# Altium PCB roneMotorBoard-v8-msp.PcbDoc
Units mil, origin at the board's own origin, x right, y up, seen from the top; angles counter-clockwise.
Board outline 3702 x 3936.38 mil, 2 copper layers (Top Layer, Bottom Layer); 60 components, 48 nets, 244 pads, 162 vias.
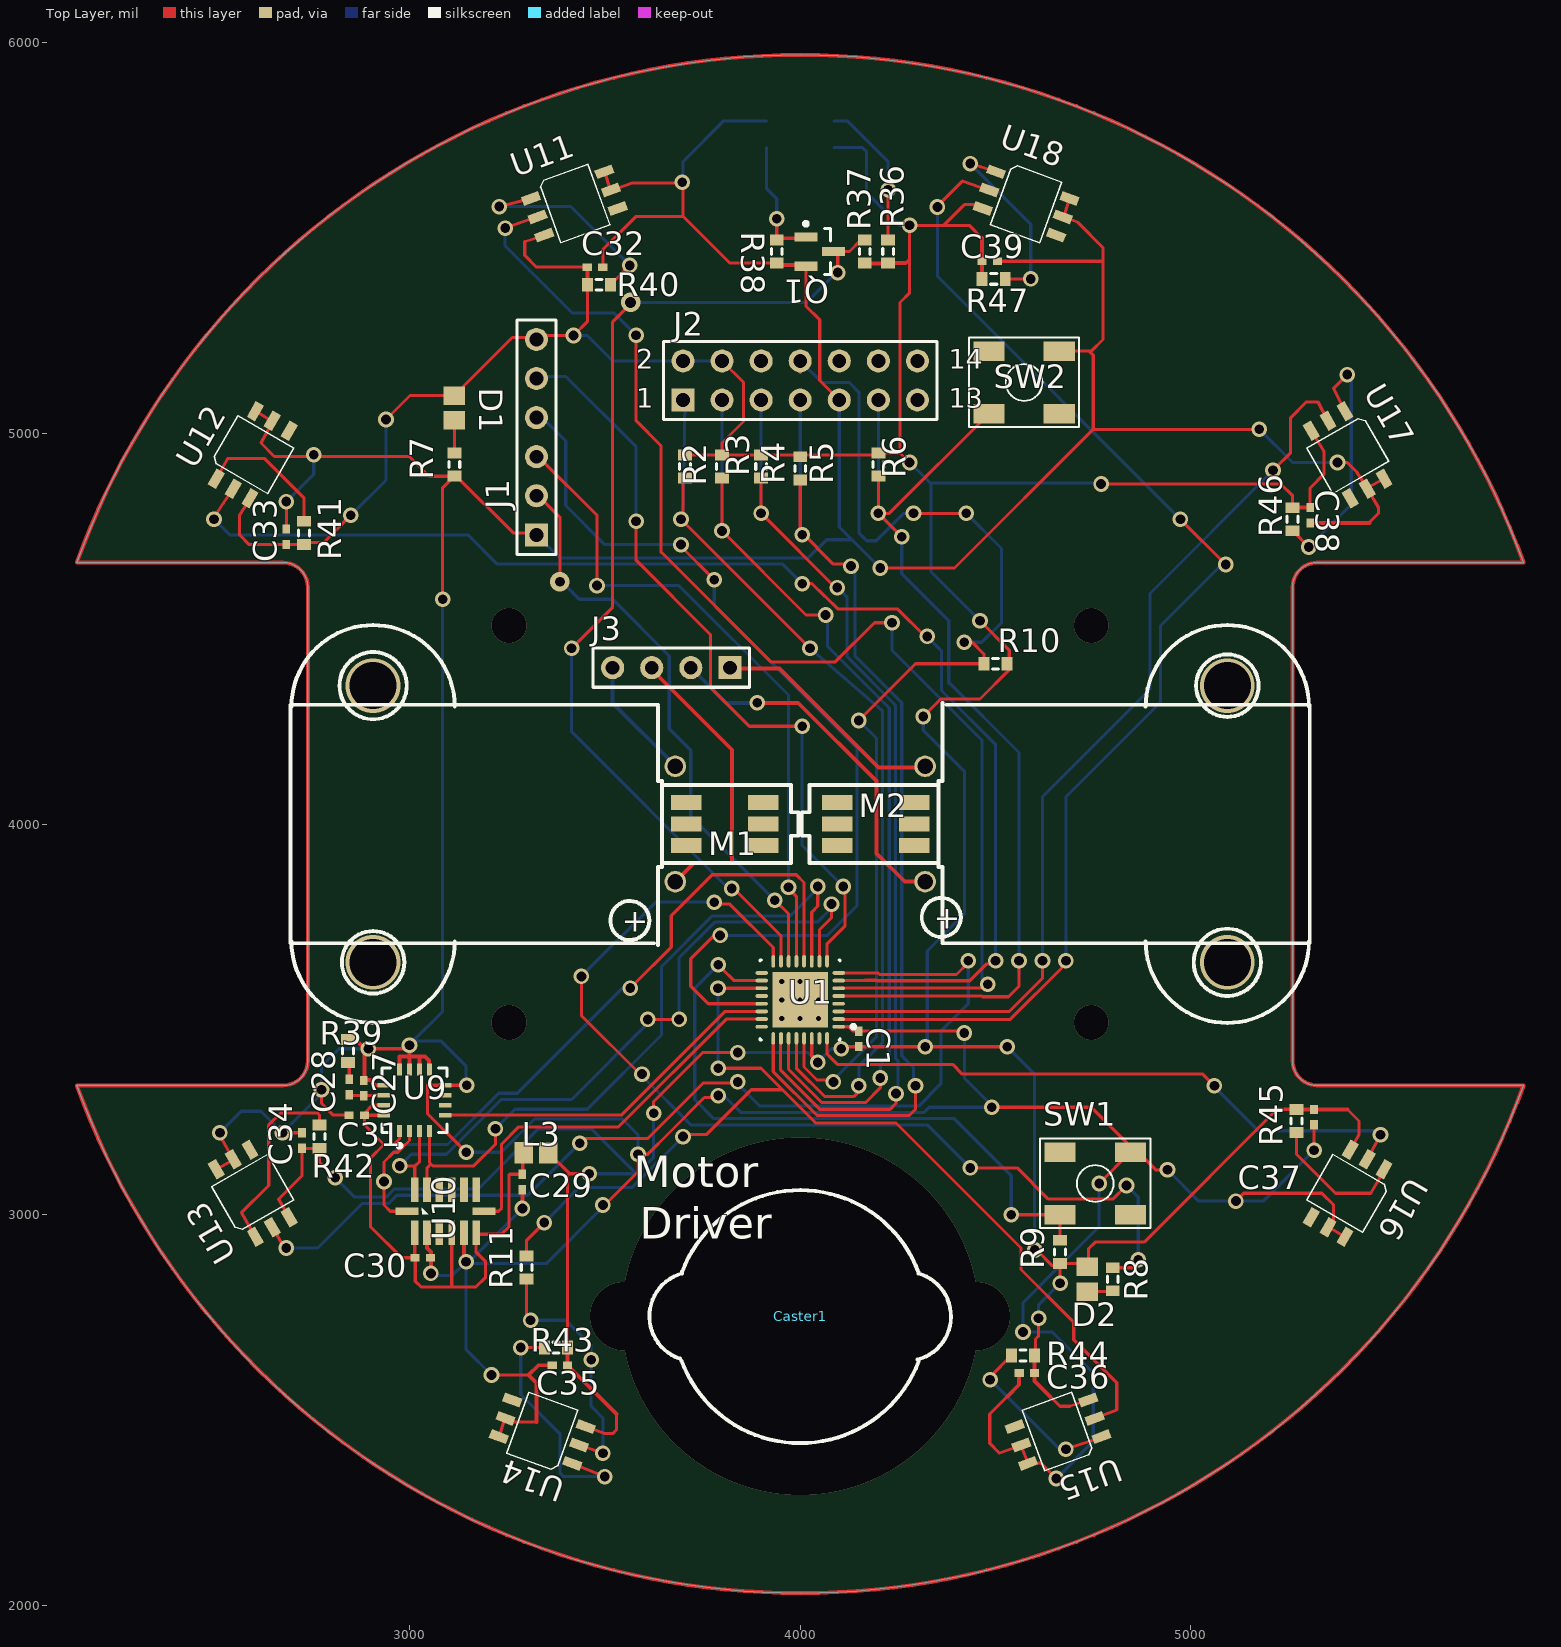
[diagram p0: Top Layer view]
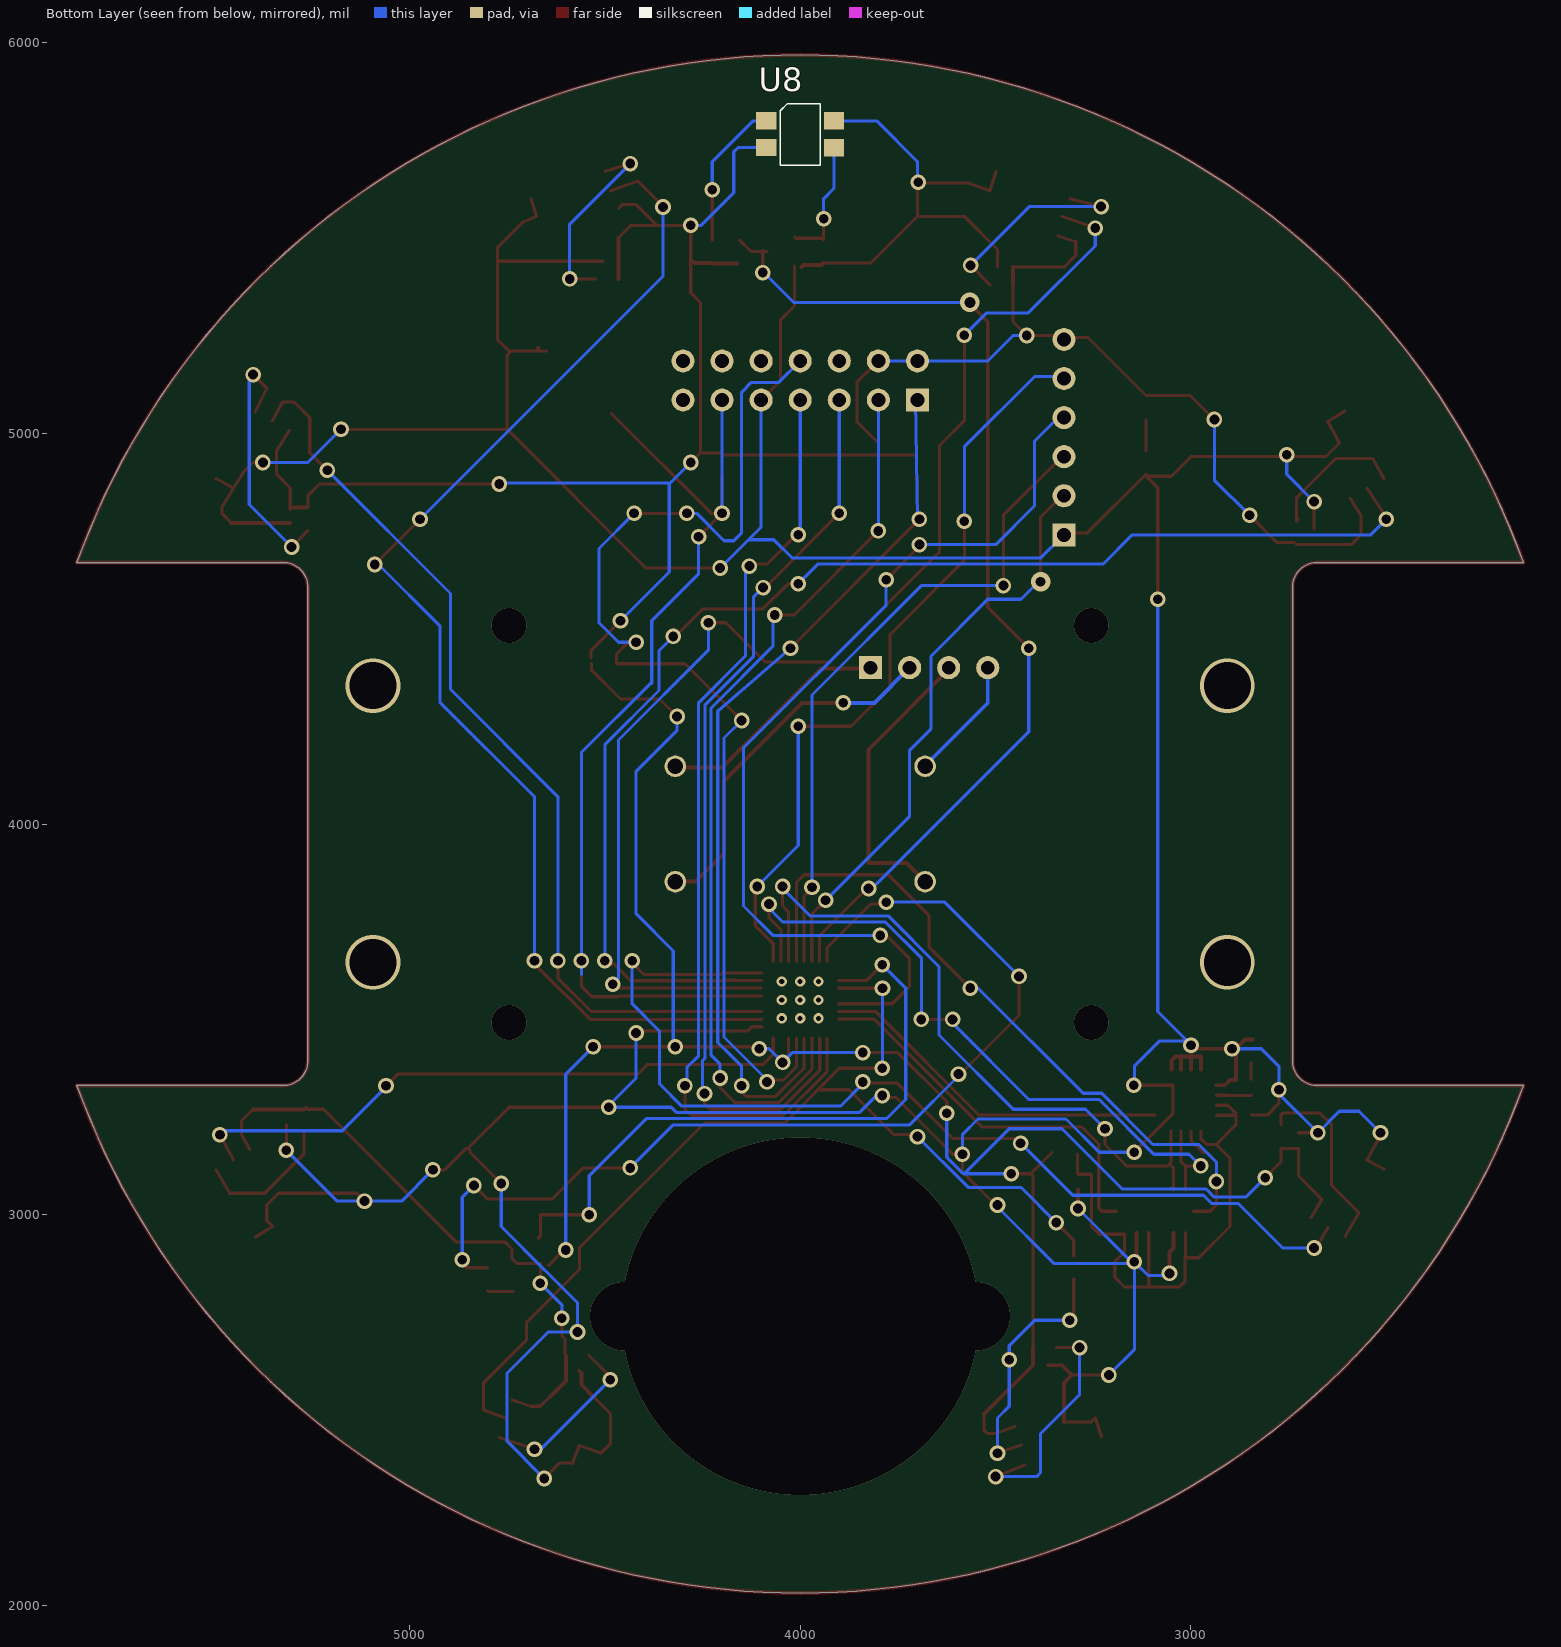
[diagram p1: Bottom Layer view, seen from below]

## Layer stack, top to bottom
Top Layer: signal copper 1.4
Dielectric: dielectric 12.6, FR-4, Dk 4.8
Bottom Layer: signal copper 1.4

## Board outline
2149,3331 2677,3331 ccw(c2677,3394) 2740,3394 2740,4606 ccw(c2677,4606) 2677,4669 2149,4669 cw(c4000,4000) 5851,4669 5323,4669 ccw(c5323,4606) 5260,4606 5260,3394 ccw(c5323,3394) 5323,3331 5851,3331 cw(c4000,4000)

## Design rules (kind name [scope] priority, off if disabled: settings)
Clearance [All] p1: gap=8
PolygonConnect [All] p1: connectstyle=Relief reliefconductorwidth=10 reliefentries=4 polygonreliefangle="90 Angle"
RoutingVias [All] p1: holewidth=25 width=40 viastyle="Through Hole" minholewidth=25 minwidth=40 maxholewidth=25 maxwidth=40
SMDNeckDown [All] p1: percent=50.000
SilkscreenOverComponentPads [All] p1: minsilkscreentomaskgap=10
SolderMaskExpansion [All] p1: expansion=4
Width "Schematic Width Constraint_12" [InNet('NetJ3_3')] p1: maxlimit=25 minlimit=10 preferedwidth=20 minimp=50.000000 maximp=50.000000 favimp=50.000000
Width "Schematic Width Constraint_11" [InNet('NetJ3_4')] p2: maxlimit=25 minlimit=10 preferedwidth=20 minimp=50.000000 maximp=50.000000 favimp=50.000000
Width "Schematic Width Constraint_10" [InNet('NetJ3_1')] p3: maxlimit=25 minlimit=10 preferedwidth=20 minimp=50.000000 maximp=50.000000 favimp=50.000000
Width "Schematic Width Constraint_9" [InNet('NetJ3_2')] p4: maxlimit=25 minlimit=10 preferedwidth=20 minimp=50.000000 maximp=50.000000 favimp=50.000000
Width MotorWidth [InNetClass('MotorNets')] p5: maxlimit=25 minlimit=8 preferedwidth=25
Width [All] p6: maxlimit=8 minlimit=8 preferedwidth=8
27 further rules are at their usual default settings.

## Classes and differential pairs
component class LineCliffSensors: Q1 R36 R37 R38 U8
component class GyroAccelHeaders: C27 C28 C29 C30 C31 L3 R39 U9 U10
component class BumpSensors: C32 C33 C34 C35 C36 C37 C38 C39 R11 R40 R41 R42 R43 R44 R45 R46 R47 U11 U12 U13 U14 U15 U16 U17 U18
component class motorEncoder: Caster1 J3 M1 M2
component class MSP430: C1 D1 D2 J1 J2 R2 R3 R4 R5 R6 R7 R8 R9 R10 R? SW1 SW2 U1

## Components (designator, comment, footprint, x,y, rotation, side; value= is the part's Value field where it differs from the comment)
C1 "Cap Semi" CAPC1005L 4150,3450 r270 top
C27 "Cap Semi" CAPC1005L 2883,3324 r90 top
C28 "Cap Semi" CAPC1005L 2846,3327 r90 top
C29 "Cap Semi" CAPC1005L 3289,3084 r90 top
C30 "Cap Semi" CAPC1005L 3034,2890 r180 top
C31 "Cap Semi" CAPC1005L 2865,3255 r0 top
C32 "Cap Semi" CAPC1005L 3475,5425 r180 top locked
C33 "Cap Semi" CAPC1005L 2685,4735 r270 top locked
C34 "Cap Semi" CAPC1005L 2725,3190 r270 top
C35 "Cap Semi" CAPC1005L 3385,2615 r0 top locked
C36 "Cap Semi" CAPC1005L 4580,2595 r0 top locked
C37 "Cap Semi" CAPC1005L 5315,3250 r90 top locked
C38 "Cap Semi" CAPC1005L 5305,4790 r90 top locked
C39 "Cap Semi" CAPC1005L 4485,5440 r180 top locked
Caster1 "non connect" "3/4\"CASTER2" 4000,2740 r180 top locked
D1 "power" INDC2012L 3115,5065 r270 top
D2 "blinky" INDC2012L 4735,2835 r270 top
J1 "SPI" HDR1X6 3325,4740 r90 top
J2 "JTAG" HDR2X7 3700,5085 r0 top
J3 "motor header" HDR1X4 3820,4400 r180 top
L3 "Inductor" INDC2012L 3324,3159 r0 top
M1 "motorEncoder_V7b" motorEncoder_V7b 3956,4000 r180 top
M2 "motorEncoder_V7b" motorEncoder_V7b 4044,4000 r0 top
Q1 "NPN" SOT-23 4050,5465 r0 top
R2 "Res3" RESC1608L 3705,4915 r90 top
R3 "Res3" RESC1608L 3800,4915 r90 top
R4 "Res3" RESC1608L 3900,4915 r90 top
R5 "Res3" RESC1608L 4000,4910 r90 top
R6 "Res Semi" RESC1608L 4200,4920 r90 top
R7 "330" RESC1608L 3115,4920 r90 top
R8 "330" RESC1608L 4800,2835 r90 top
R9 "Res Semi" RESC1608L 4665,2905 r270 top
R10 "Res Semi" RESC1608L 4500,4410 r0 top
R11 "Res3" RESC1608L 3300,2865 r270 top
R36 "Res3" RESC1608L 4225,5465 r90 top
R37 "Res3" RESC1608L 4165,5465 r270 top
R38 "Res3" RESC1608L 3940,5465 r270 top
R39 "Res3" RESC1608L 2843,3419 r270 top
R40 "Res3" RESC1608L 3485,5380 r180 top locked
R41 "Res3" RESC1608L 2730,4745 r270 top
R42 "Res3" RESC1608L 2770,3200 r270 top
R43 "Res3" RESC1608L 3375,2660 r0 top locked
R44 "Res3" RESC1608L 4570,2640 r0 top locked
R45 "Res3" RESC1608L 5270,3240 r90 top locked
R46 "Res3" RESC1608L 5260,4780 r90 top locked
R47 "Res3" RESC1608L 4495,5395 r180 top locked
SW1 "push button" SwitchTall-TL330 4755,3080 r0 top
SW2 "reset button" SwitchTall-TL330 4573,5130 r0 top
U1 "MSP430" MSP430_32PIN 4000,3550 r180 top locked
U8 "GP2S27TJ000F" GP2S27J0000F 4000,5765 r180 bottom locked
U9 "L3G4200D" L3G2004D 3013,3293 r90 top
U10 "MMA7455L" MMA7455L 2994,2950 r90 top locked
U11 "SFH9240-Z" SFH9240-Z 3422,5588 r20 top locked
U12 "SFH9240-Z" SFH9240-Z 2599,4945 r60 top locked
U13 "SFH9240-Z" SFH9240-Z 2599,3055 r120 top locked
U14 "SFH9240-Z" SFH9240-Z 3340,2445 r160 top locked
U15 "SFH9240-Z" SFH9240-Z 4660,2445 r200 top locked
U16 "SFH9240-Z" SFH9240-Z 5401,3055 r240 top locked
U17 "SFH9240-Z" SFH9240-Z 5401,4945 r300 top locked
U18 "SFH9240-Z" SFH9240-Z 4578,5588 r340 top locked

## Footprints (in the part's own frame and the unit in brackets; to place one, negate y for a bottom-side part, rotate by r counter-clockwise, add the part's x,y. Pads: shape width x height; smd on the part's side, far side on the other; paste and mask are expansions set on the pad)
"3/4\"CASTER2" [mil] "3/4\" caster for board"
  silkscreen extent -386,-323 386,324
CAPC1005L [mm] "Chip Capacitor, Body 1.0x0.5mm, IPC High Density"
  rect 0.6x0.5 smd: 1(-0.5,0) 2(0.5,0)
  body extent -0.55,-0.3 0.55,0.3, height 1.3
GP2S27J0000F [mil] "Phototransistor Output, Compact Reflective Photointerrupter"
  rect 52x44 smd: 1(-86.61,34.45) 2(-86.61,-33.74) 3(86.61,-34.45) 4(86.61,34.45)
  silkscreen extent -51,-79 51,79, body extent -59,-78 59,79, height 67
HDR1X4 [mm] "Connector; Header; 4 Position"
  rect 1.5x1.5 hole 0.9: 1(0,0)
  round 1.5 hole 0.9: 2(2.54,0) 3(5.08,0) 4(7.62,0)
  silkscreen extent -1.27,-1.27 8.89,1.27
HDR1X6 [mm] "Connector; Header; 6 Position"
  rect 1.5x1.5 hole 0.9: 1(0,0)
  round 1.5 hole 0.9: 2(2.54,0) 3(5.08,0) 4(7.62,0) 5(10.16,0) 6(12.7,0)
  silkscreen extent -1.27,-1.27 13.97,1.27
HDR2X7 [mm] "Connector; Header; 7x2 Position"
  rect 1.5x1.5 hole 0.9: 1(0,0)
  round 1.5 hole 0.9: 2(0,2.54) 3(2.54,0) 4(2.54,2.54) 5(5.08,0) 6(5.08,2.54) 7(7.62,0) 8(7.62,2.54) 9(10.16,0) 10(10.16,2.54) 11(12.7,0) 12(12.7,2.54) 13(15.24,0) 14(15.24,2.54)
  silkscreen extent -1.27,-1.27 16.51,3.81
INDC2012L [mm] "Chip Inductor, Body 2.0x1.2mm, IPC High Density"
  rect 1.2x1.4 smd: 1(-0.8,0) 2(0.8,0)
  body extent -1.1,-0.7 1.1,0.7, height 0.55
L3G2004D [mm] "gyroscope"
  rect 0.8x0.3 smd: 1(-2,0.975) 2(-2,0.325) 3(-2,-0.325) 4(-2,-0.975) 9(2,-0.975) 10(2,-0.325) 11(2,0.325) 12(2,0.975)
  rect 0.3x0.8 smd: 5(-0.975,-2) 6(-0.325,-2) 7(0.325,-2) 8(0.975,-2) 13(0.975,2) 14(0.325,2) 15(-0.325,2) 16(-0.975,2)
  silkscreen extent -3.07,-2.1 2.1,2.1, body extent -2.08,-2.08 2.07,2.07, height 1.1
MMA7455L [mm]
  rect 1.6x0.5 smd: 1(0.1,-0.5) 2(0.1,-1.3) 3(0.1,-2.1) 5(0.1,-3.7) 6(0.1,-4.5) 8(2.9,-4.5) 9(2.9,-3.7) 10(2.9,-2.9) 11(2.9,-2.1) 12(2.9,-1.3) 13(2.9,-0.5)
  rect 1.6x0.4 smd: 4(0.1,-2.9)
  rect 0.5x1.5 smd: 7(1.5,-5) 14(1.5,0)
  silkscreen extent 1.31,-1.37 1.74,-0.97
motorEncoder_V7b [mm] "Precision Wire Wound Inductor, 2-Leads, Body 2.5x2.3mm, IPC Medium Density"
  rect 2x1 smd: A(1.291,1.4) C(6.291,1.4) E1(6.291,0) E2(6.291,-1.4) K(1.291,-1.4) NC(1.291,0)
  round 1.4 hole 1: M1(7,3.75) M2(7,-3.75)
  Mechanical 1 keep-out region: 8.382,-7.874 32.004,-7.874 32.004,7.62 8.382,7.62
  silkscreen extent -1.02,-12.93 32,12.93
MSP430_32PIN [mm] "32 pin QFN"
  oval 0.8x0.25 smd: 1(-2.5,1.75) 2(-2.5,1.25) 3(-2.5,0.75) 4(-2.5,0.25) 5(-2.5,-0.25) 6(-2.5,-0.75) 7(-2.5,-1.25) 8(-2.5,-1.75) 17(2.5,-1.75) 18(2.5,-1.25) 19(2.5,-0.75) 20(2.5,-0.25) 21(2.5,0.25) 22(2.5,0.75) 23(2.5,1.25) 24(2.5,1.75)
  oval 0.25x0.8 smd: 9(-1.75,-2.5) 10(-1.25,-2.5) 11(-0.75,-2.5) 12(-0.25,-2.5) 13(0.25,-2.5) 14(0.75,-2.5) 15(1.25,-2.5) 16(1.75,-2.5) 25(1.75,2.5) 26(1.25,2.5) 27(0.75,2.5) 28(0.25,2.5) 29(-0.25,2.5) 30(-0.75,2.5) 31(-1.25,2.5) 32(-1.75,2.5)
  rect 3.6x3.6 smd: 33(0,0)
  silkscreen extent -3.58,-2.6 2.6,2.6, body extent -2.58,-2.57 2.57,2.58, height 1
RESC1608L [mm] "Chip Resistor, Body 1.6x0.8mm, IPC High Density"
  rect 0.7x0.9 smd: 1(-0.75,0) 2(0.75,0)
  silkscreen extent -0.2,-0.35 0.2,0.35, body extent -0.85,-0.48 0.85,0.48, height 0.9
SFH9240-Z [mil] "Reflective Interrupter with Schmitt-Trigger"
  rect 47x24 smd: 1(-100,50) 2(-100,0) 3(-100,-50) 4(100,-50) 5(100,0) 6(100,50)
  silkscreen extent -67,-83 67,83, body extent -59,-78 59,79, height 67
SOT-23 [mm] "SOT23, 3-Leads, Body 3.0x2.5mm (max), Pitch 0.95mm, IPC Medium Density"
  rect 1.5x0.6 smd: 1(-0.9,0.95) 2(-0.9,-0.95) 3(0.9,0)
  silkscreen extent -1.02,-1.5 0.7,1.92, body extent -0.7,-1.5 0.7,1.5, height 1.2
SwitchTall-TL330 [mil] "Small SMDTall Tact Switch E-Switch TL330"
  rect 80x50 smd: 1(-90,80) 2(90,80) 3(-90,-80) 4(90,-80)
  silkscreen extent -141,-114 141,115

## Part data
C1 C27 C28 C29 C30 C31 C32 C33 C34 C35 C36 C37 C38 C39: "Capacitor (Semiconductor SIM Model)"
Caster1: library part "Caster 3/4in", "This is just a space saver to get the caster onto the pcb"
D1 D2: library part LED
J1: library part "Header 6", "Header, 6-Pin"
J2: library part "Header 7X2", "Header, 7-Pin, Dual row"
J3: library part "Header 4", "Header, 4-Pin"
R2 R3 R4 R5 R11 R36 R37 R38 R39 R40 R41 R42 R43 R44 R45 R46 R47: "Resistor"
R6 R9 R10: "Semiconductor Resistor"
R7 R8: library part Res3, "Resistor"
SW1 SW2: library part Switch-TL330
U1: library part MSP430_32pin
U9: "3axis gyroscope, SPI"
U10: "3axis accelerometer"

## Via types
v1: diameter 40, hole 25, Top Layer to Bottom Layer, 136 vias
v2: diameter 25.98, hole 12.99, Top Layer to Bottom Layer, tented top, 9 vias
v3: diameter 89, hole 89, Top Layer to Bottom Layer, 8 vias
v4: diameter 140, hole 120, Top Layer to Bottom Layer, 4 vias
v5: diameter 175, hole 175, Top Layer to Bottom Layer, 2 vias
v6: diameter 50, hole 25, Top Layer to Bottom Layer, 1 vias
v7: diameter 915, hole 915, Top Layer to Bottom Layer, 1 vias
v8: diameter 50, hole 28, Top Layer to Bottom Layer, 1 vias

## Nets (pads, with @x,y where several pads share a name; then routed paths per layer and width w, separated by ;. In a path a pad name is that pad's centre, name@x,y a point inside that pad or via, vN(x,y) a via of type N, cw(c..) or ccw(c..) an arc to the next point about the centre after c; other vN are vias at no path point)
3.3V: C1.2 C32.2 C33.2 C34.2 C35.2 C36.2 C37.2 C38.2 C39.2 D1.1 D2.1 J1.6 J2.2 J2.4 L3.2 R2.2 R3.2 R4.2 R5.2 R6.2 R9.2 R10.2 R36.1 R37.2 R40.2 R41.2 R42.2 R43.2 R44.2 R45.2 R46.2 R47.2 U1.30 U8.2 U11.3 U12.3 U13.3 U14.3 U15.3 U16.3 U17.3 U18.3 | length 13213.4
  Top Layer w8: U12.3 2565,4790 2565,4740 2590,4715 R41.2@2730,4715 ; U13.3 2665,3040 2725,3100 C34.2 R42.2@2770,3170 ; R41.2@2735,4720 2780,4720 v1(2850,4790) ; R42.2 2770,3135 v1(2810,3095) ; v1(2940,5035) 3001.5,5096.5 D1.1 3263.5,5245 J1.6@3325,5245 ; J1.6 3335,5250 v1(3420,5250) 3455.47,5285.47 R40.2 ; U11.3@3340,5505 3295,5490 3295,5455 3325,5425 C32.2 ; L3.2@3355.75,3159.25 3410,3105 ; R43.2 3404.53,3099.53 3410,3105 ; U14.3 3500,2440 3520,2440 3530,2450 3530,2489.69 ; v1(3460,3105) 3410,3105 ; v1(3625,3260) 3630,3260 3625,3265 3625,3290 3750,3415 v1(3840,3415) v1@3840,3410 ; R2.2 R3.2@3794.53,4944.53 ; J2.4 3855,5130 3855,5030 3800,4975 R3.2 R4.2 4199.53,4944.53 R6.2@4204.53,4949.53 ; 4029.53,3405.47 U1.30 ; v1@4110,3430 C1.2@4145,3430 ; C1.2@4150,3430 C1.2@4145,3430 ; R6.2 R6.2@4204.53,4949.53 ; R6.2@4205,4950 R6.2@4204.53,4949.53 ; 4270,5435 4280,5445 ; v1(4280,4925) 4255.47,4949.53 ; v1(4315,4275) 4360,4320 4460,4320 4534.53,4394.53 R10.2@4534.53,4410 ; v1(4460,4520) 4535,4445 R10.2@4535,4425 ; U18.3@4465,5575 4455,5585 4420,5585 4367,5532 ; 4465.29,5499.71 4433,5532 4367,5532 ; v1(4530,3430) v1(4320,3430) C1.2@4145,3430 ; R44.2 4602,2642.47 4602,2682 4610,2690 v1(4610,2735) ; v1(4600,2910) 4605,2910 4645,2870 ; 4640,2535 4665,2510 4690,2510 U15.3 ; v1(4665,2825) R9.2@4665,2865 ; R9.2 4725.47,2875.47 4737.5,2887.5 4737.5,2912.5 4755,2930 4880,2930 5220,3270 5260,3270 R45.2@5265,3275 ; v1(4770,4870) 5200,4870 ; 5205,4870 5200,4870 ; R46.2 5260,4840 5230,4870 5200,4870 ; C38.2@5305,4805 5305,4860 5340,4895 5340,4955 U17.3 ; 5400.47,3269.53 5430,3240 5430,3205 U16.3 ; R6.2@4204.53,4949.53 4255.47,4949.53 ; 4255.47,4949.53 4255.47,5334.53 4280,5359.06 4280,5445 ; 4280,5445 v1(4280,5532) 4367,5532
  Top Layer w10: R43.2@3404.69,2659.69 C35.2 3530,2489.69 ; R40.2 C32.2@3455.47,5425 ; R37.2@4162,5434 4223.53,5434 R36.1 4268.47,5435.47 ; 4465.29,5499.71 C39.2 R47.2 ; R44.2 4599.53,2574.47 4639,2535 ; R46.2@5265.47,4809.53 C38.2@5305,4809.53 ; R45.2 5400.47,3269.53
  Bottom Layer w8: v1(2810,3095) 2860,3045 2940.25,3045 2961.25,3066 3176,3066 3330,3220 3465,3220 3580,3105 ; v1(2850,4790) 2940,4880 v1(2940,5035) ; v1(3420,5250) 3455,5250 3520,5185 J2.2 J2.4 ; v1(3460,3105) 3582.37,3105 3625,3147.63 3625,3255 3630,3260 v1(3625,3260) ; v1(3840,3415) 4020,3415 v1(4045,3390) 4080,3425 v1(4105,3425) ; U8.2 4158.74,5731.26 4170,5720 4170,5615 4253,5532 v1@4278,5532 ; v1(4280,4925) 4332.5,4872.5 ; v1(4315,4275) 4315,4240 4420,4135 4420,3770 4325,3675 4325,3435 v1(4320,3430) ; v1(4460,4520) 4335,4645 4335,4870 4332.5,4872.5 ; v1(4530,3430) 4600,3360 v1(4600,2910) ; v1(4610,2735) 4610,2770 v1(4665,2825) ; v1(4770,4870) 4767.5,4872.5 4332.5,4872.5
BUMP0: U1.6 U11.2 | length 3302.8
  Top Layer w8: v1(3245,5525) 3327.87,5554.25 U11.2@3330,5555 ; v1(3580,5251) 3580,5032 3643.43,4968.57 3643.43,4695.57 ; 3645,4695 3925,4415 4008.75,4415 ; 4010,4415 4040,4415 ; 4041.25,4415 4090,4415 4190,4515 v1(4235,4515) ; U1.6@4100,3580 4470,3580 v1(4480,3590)
  Bottom Layer w8: v1(3245,5525) 3245,5479 3416,5308 3523,5308 v1(3580,5251) ; v1(4235,4515) 4235,4445 4465,4215 4465,3605 v1(4480,3590)
BUMP1: U1.7 U12.2 | length 3355.9
  Top Layer w8: v1@2497.66,4781.57 2523.85,4820.77 U12.2 ; v1(4005,4615) 4030.25,4615 4097,4550 4218.75,4550 ; U1.7 4165.79,3599.21 4166.57,3600 4195.17,3600 4196.17,3599 4434,3599 4477,3642 4492,3642 v1(4500,3650) ; 4220,4550 4250,4550 4320,4480 v1(4325,4480)
  Bottom Layer w8: v1(2500,4780) 2540,4740 2633,4740 3150,4740 3225,4665 3955,4665 v1(4005,4615) ; v1(4325,4480) 4361.31,4443.69 4361.31,4341.31 ; 4361.5,4341.5 4500,4203 v1@4500,3660
BUMP2: U1.8 U13.2 | length 2656.3
  Top Layer w8: U13.2 2680,2915 v1(2685,2915) ; v1@3440,3185 3450,3195 3610,3195 3752.5,3337.5 v1@3842.5,3337.5 ; U1.8 4198.9,3618.9 4202.8,3615 4400,3615 4430,3645 v1(4430,3650)
  Bottom Layer w8: v1(2685,2915) 2765,2915 2879,3029 2946.88,3029 2967.88,3050 3303,3050 v1(3436,3183) ; v1@3840,3335 3897,3278 4303,3278 4360,3335 4360,3470 4430,3540 v1(4430,3650)
  other v1: 3840,3340
BUMP3: R11.2 U14.2 | length 644.4
  Top Layer w8: R11.2@3300,2835 3300,2740 v1(3310,2730) ; U14.2 v1(3495,2390) ; v1@3464,2630 v1(3465,2629)
  Bottom Layer w8: v1(3310,2730) 3400,2730 3465,2665 v1(3465,2629) 3465,2510 3495,2480 v1(3495,2390)
BUMP4: R11.1 U1.19 U15.2 | length 2745.7
  Top Layer w8: R11.1 3300,2935 v1(3345,2980) ; v1(3700,3200) 3710,3200 3715,3205 3760,3205 3875,3320 3955,3320 ; v1(3789.53,3579.53) U1.19 ; v1(3790,3375) 3899.75,3375 4039.75,3235 4245,3235 4565,2915 4565,2860 4700,2725 4700,2680 4810,2570 4810,2500 U15.2@4755,2480
  Bottom Layer w8: v1(3345,2980) 3435,3070 3570,3070 3705,3205 3710,3200 v1(3700,3200) ; v1@3789.53,3365.47 v1(3789.53,3579.53)
BUMP5: U1.32 U16.2 | length 1616.4
  Top Layer w8: U1.32 4068.9,3411.36 4077,3403.25 ; 4077,3403 4095,3385 4390,3385 4415,3360 5030,3360 v1(5060,3330) v1@5055,3325 ; U16.2@5450,3140 5450.89,3141.66 v1(5485,3205)
  Bottom Layer w8: v1@5063.5,3323.5 5172,3215 5475,3215 v1(5485,3205)
BUMP6: U1.3 U17.2 | length 2413
  Top Layer w8: U1.3 4098.9,3520 4535,3520 4620,3605 v1(4620,3650) ; v1@5210,4895 5210,4910 5215,4910 5255,4950 5255,5040 5295,5080 5325,5080 U17.2
  Bottom Layer w8: v1(4620,3650) 4620,4070 4895,4345 4895,4590 v1@5212.5,4907.5
  other v1: 5210,4905
BUMP7: U1.2 U18.2 | length 3220.7
  Top Layer w8: U1.2 4099.21,3500 4537.63,3500 4670,3632.37 v1@4670,3650 ; v1(4351,5579) 4351,5581 4415,5645 4483.44,5620.56 U18.2@4485,5620 ; v1(4973,4780) v1(5089,4664)
  Bottom Layer w8: 4351,5401 v1(4351,5579) ; 4352,5401 v1(4973,4780) ; v1(4680,3650) 4680,4070 4922,4312 4922,4507 5079,4664 v1(5089,4664)
CLIFF1: Q1.3 R37.1 U1.15 | length 2681.1
  Top Layer w8: v1(3415,4450) 3520,4555 3520,5285 3559.5,5324.5 v8@3559.5,5333.5 ; v1(3825,3835) 3830,3835 3950.79,3714.21 U1.15 ; Q1.3 Q1.3@4096,5465 ; v1(4096,5411) Q1.3@4096,5465 ; Q1.3@4096,5467 Q1.3@4096,5465 ; R37.1@4155,5494 4126,5465 Q1.3@4096,5465
  Bottom Layer w8: v1@3415,4459 3415,4236 3805,3846 ; v8(3566,5335) 4017,5335 v1@4099,5417 ; v1@3810,3840 3820,3840 v1(3825,3835)
FROBBY_BUTTON: R9.1 SW1.3 U1.18 | length 1687.9
  Top Layer w8: v1(3790,3640) 3790,3630 3800,3630 3830.79,3599.21 U1.18 ; v1(4540,3000) SW1.3 4665,2945 R9.1@4670,2940
  Bottom Layer w8: v1(3790,3640) 3790,3630 3780,3630 3730,3580 3730,3295 3779,3246 4394,3246 4540,3100 v1(4540,3000)
GND: C1.1 C27.2 C29.1 C30.1 C31.1 C32.1 C33.1 C34.1 C35.1 C36.1 C37.1 C38.1 C39.1 J1.1 J2.9 Q1.2 R7.1 R38.2 R39.1 SW1.2 SW2.2 U1.1 U8.4 U9.8 U9.9 U9.10 U9.11 U9.12 U9.13 U10.2 U10.5 U11.5 U11.6 U12.5 U12.6 U13.5 U13.6 U14.5 U14.6 U15.5 U15.6 U16.5 U16.6 U17.5 U17.6 U18.5 U18.6 | length 17264.5
  Top Layer w8: U13.6 2549.88,3139.94 2550,3140 2549.08,3141.65 v1@2510.85,3210.47 ; U12.6 2648.56,5030.87 2650,5030 2620,4975 2654.4,4940.6 2655.6,4940.6 2656.2,4940 3000,4940 3050,4890 R7.1@3114.53,4890 ; v1(2675.13,3210.13) 2675.25,3210 C34.1@2725,3210 ; C33.1 v1(2685,4825) ; v1(2775,3320) 2775,3285 2805,3255 C31.1 ; v1(2895,3425) 2990,3425 v1@3000,3435 ; v1(3085,4575) 3085,4860.47 R7.1@3114.53,4890 ; U9.8 3046.39,3331.39 3046.39,3258.61 v1(3145.13,3159.87) ; R7.1@3115,4890 R7.1@3114.53,4890 ; R7.1 R7.1@3114.53,4890 ; R7.1@3115,4895.47 3265.47,4745 J1.1@3325,4745 ; v1(3210,2590) 3305,2590 ; U14.6 3244.86,2479.59 3245,2480 3255,2470 3325,2470 ; v1(3495,3025) 3495,3020 3585,3110 v1(3585,3155) 3610,3155 3668,3213 3668,3213.25 3754.75,3300 3790,3300 v1(3790,3305) ; C32.1@3495,5425 3495,5470 3580,5555 3700,5555 ; U11.6 3514.44,5621.7 3515,5620 3516.56,5620.57 3570,5640 3700,5640 3700,5555 ; R38.2 3819.53,5435.47 3700,5555 ; Q1.2 4014.57,5325.43 4050,5290 4050,5135 J2.9 ; U1.1 4123.9,3481.1 4135,3470 v1@4410,3470 ; v1(4205,4655) 4395,4655 4750,5010 ; v1@4410.47,3470 v1@4410,3470 ; v1@4415,3465 v1@4410,3470 ; v1(4490,3275) 4745,3275 4850,3170 SW1.2@4845,3165 ; C39.1 4775,5440 ; 4530,2535 4485,2490 4485,2415 4510,2390 4565,2410 4582.31,2365.91 U15.6@4582.67,2365 ; C36.1 C36.1@4566.25,2600.94 ; U15.6@4580,2365 U15.6@4582.67,2365 ; U15.6 U15.6@4582.67,2365 ; SW2.2@4650,5210 SW2.2 4740,5210 ; v1(4655,2325) 4615,2365 U15.6@4582.67,2365 ; SW2.2@4670,5220 4670,5215 SW2.2@4671.76,5219.28 ; U18.6 4675,5555 4710,5540 4775,5475 4775,5240 4745,5210 4740,5210 ; v1(4765,3080) SW1.2 ; SW1.2@4855,3170 4910,3115 v1(4940,3115) ; v1(5115,3035) 5135,3055 5335,3055 5365,3025 5365,2985 5350,2970 5351.44,2969.13 U16.6 ; v1(5175,5010) 4750,5010 ; v1(5315,3165) C37.1 ; v1(5375,4925) 5400,4925 5425,4900 U17.5 ; 5455,4770 5455.31,4770.31 5480,4795 5480,4810 U17.5 5450,4860 5450.12,4860.06 U17.6 ; 4740,5210 4750,5200 4750,5010
  Top Layer w10: R39.1 2861.47,3448.53 v1@2885,3425 ; v1(2895,3425) v1@2885,3425 ; U9.13 2913.61,3331.39 2900,3345 2885,3345 v1@2885,3425 ; U9.12 2974.61,3405 3000.2,3405 ; U9.11 3000.2,3405 ; v1@3000.2,3425.2 3000.2,3405 ; U9.10 3025.8,3404.2 ; U10.2 3045.18,2914.82 3055,2905 v1(3055,2850) ; U9.9@3050,3371.74 3050,3395 3040,3405 3000.2,3405 ; U9.8 v1(3146.39,3331.39) ; U10.5 3139.67,2885.33 v1(3145,2880) ; v1(3289,3016) C29.1 ; 3325,2470 3325,2570 3305,2590 3330,2615 C35.1 ; R38.2 3945.47,5430 3992,5430 Q1.2@3997,5425 ; 4530,2535 4560,2565 4560,2594.69 C36.1 ; C38.1 5455.31,4770.31 5457,4770.31
  Bottom Layer w8: v1(2515,3210) 2570,3265 2620.25,3265 v1(2675.13,3210.13) 2775,3310 v1(2775,3320) 2775,3380 2820,3425 v1(2895,3425) ; v1(2685,4825) 2755,4895 v1(2755,4945) ; v1@3000,3445 v1@3010,3445 ; v1@3055,2845 3110,2845 3140,2875 v1(3145,2880) v1@3145,2875 ; v1(3085,4575) 3085,3520 v1@3010,3445 ; v1@3145,3345 3145,3380 3080,3445 v1@3010,3445 ; v1(3145.13,3159.87) 3145.25,3160 3235,3160 3320,3245 3545,3245 3585,3205 3585,3160.88 3588.68,3157.21 3590,3155 v1(3585,3155) ; v1@3150,2880 3153,2880 v1(3289,3016) ; v1(3210,2590) 3145,2655 v1@3145,2875 ; J1.1@3335,4735 3330,4735 3384,4681 4021,4681 4067.5,4727.5 4132.5,4727.5 ; v1(3495,3025) 3495,3020 3350,2875 v1@3145,2875 ; v1@3700,5645 3700,5695 3804.45,5799.45 U8.4 ; v1@3805,3305 3848,3262 4317,3262 4330,3275 v1@4495,3275 ; J2.9 4100,4760 4132.5,4727.5 ; v1(4205,4655) 4132.5,4727.5 ; v1@4415,3465 v1@4420,3470 ; v1(4420,3465) 4420,3350 v1@4498,3272 ; v1@4567.53,2685 4570,2687.47 v1(4570,2700) ; v1@4660,2330 4750,2420 4750,2595 4645,2700 v1(4570,2700) ; v1(4765,3080) 4765,2970 4652,2857 4651.75,2857 4570,2775.25 v1(4570,2700) ; v1(4940,3115) 5020,3035 v1(5115,3035) 5185,3035 v1(5315,3165) ; v1(5175,5010) 5260,4925 v1(5375,4925)
  Bottom Layer w10: v1@3135,2875 v1@3140,2875
  other v1: 3000,3434 3698,5642
JTAG_BOTTOM_TCK: J2.7 R5.1 U1.25 | length 2595.2
  Top Layer w8: U1.25 3931.1,3366.27 4043.37,3254 4279,3254 4295,3270 v1(4295,3330) v1@4285,3340 ; R5.1 4000,4750 4085,4665 v1@4125,4665
  Bottom Layer w8: J2.7 4000,4760 v1@4005,4755 ; v1@4125,4665 4140,4650 4140,4430.25 4260,4310.25 4260,3406.75 4290,3376.75 v1@4290,3337.37
  other v1: 4130,4660 4005,4740
JTAG_BOTTOM_TDI: J2.3 R3.1 U1.27 | length 2489.9
  Top Layer w8: v1(3800,4750) 4015,4535 v1@4070,4535 ; v1@3800,4760 R3.1 ; U1.27 3970,3451.1 3970,3372.63 4055.63,3287 4167,3287 4205,3325 v1(4205,3350) v1@4205,3360
  Bottom Layer w8: v1@3800,4740 v1(3800,4750) J2.3 ; v1@4070,4535 4070,4455 4228,4297 4228,3408 4205,3385 v1(4205,3350)
  other v1: 4065,4535
JTAG_BOTTOM_TDO: J2.1 R2.1 U1.28 | length 2395.9
  Top Layer w8: v1(3695,4780) v1(4025,4450) ; v1@3700,4775 3700,4880.47 R2.1 ; U1.28 3990.16,3375.1 4062.25,3303 4138,3303 4150,3315 v1(4150,3330)
  Bottom Layer w8: v1@3700,4780 J2.1@3705,5085 ; v1(4025,4450) 4210,4290 4211,4289 4211,3441 4182,3412 4181.75,3412 4150,3380.25 v1@4150,3335
JTAG_BOTTOM_TEST: J2.8 R10.1 U1.29 | length 2917.7
  Top Layer w8: 4000,5155 J2.8 ; U1.29 4009.84,3378.04 4042.88,3345 v1@4085,3345 ; v1(4150,4265) 4295,4410 R10.1@4465,4410 ; v1(4290,4795) v1(4425,4795) ; v1(4420,4465) 4440,4465 4470,4435 4470,4410.47 R10.1
  Bottom Layer w8: J2.8 4055,5130 4125,5130 4150,5105 4150,4745 4170,4725 4195,4725 4265,4795 v1(4290,4795) ; v1@4085,3345 4195,3455 4195,4220 v1(4150,4265) ; v1(4425,4795) 4515,4705 4515,4515 4465,4465 v1@4430,4465
  other v1: 4085,3340
JTAG_BOTTOM_TMS: J2.5 R4.1 U1.26 | length 2457.1
  Top Layer w8: v1(3900,4795) v1@4095,4600 ; v1@3900,4800 R4.1 ; U1.26 3950,3450.79 3950,3370 4050,3270 4230,3270 4245,3285 v1@4245,3305
  Bottom Layer w8: v1(3900,4795) J2.5 ; v1(4095,4605) 4120,4580 4120,4427.63 4244,4303.63 4244,3400.12 4250,3394.12 4250,3315 v1(4245,3310)
LED_IR_BEACON: U1.24
NetC28_2: C28.2 R39.2 | length 42.3
  Top Layer w8: C28.2 R39.2@2846,3389
NetD1_2: D1.2 R7.2 | length 78.5
  Top Layer w8: R7.2@3115,4955 D1.2
NetD2_2: D2.2 R8.1 | length 65.6
  Top Layer w8: D2.2 4798.5,2803.5 R8.1@4800,2805
NetJ3_1: J3.1 M2.M1 | length 605.6
  Top Layer w10: J3.1 3822,4398 3947,4398 4200,4145 M2.M1@4320,4145
NetJ3_2: J3.2 M2.M2 | length 934.8
  Top Layer w10: v1(3890,4310) 3995,4310 4195,4110 4195,3925 4267.64,3852.36 M2.M2
  Bottom Layer w10: J3.2 3810,4310 v1(3890,4310)
NetJ3_3: J3.3 M1.M1 | length 748
  Top Layer w10: J3.3@3620,4395 3825,4190 3825,3900 3728.05,3900 M1.M1
  Bottom Layer w10: M1.M1@3677.77,3855 M1.M1
NetJ3_4: J3.4 M1.M2 | length 309.2
  Bottom Layer w10: J3.4 3520,4310 M1.M2@3675,4155
NetQ1_1: Q1.1 R38.1 U8.3 | length 322
  Top Layer w8: R38.1 v1(3940,5549) ; R38.1@3941,5499 4011.17,5499 Q1.1
  Bottom Layer w8: U8.3 3913.39,5626.61 3940,5600 v1(3940,5549)
NetR8_2: R8.2 U1.16 | length 2646.4
  Top Layer w8: v1(3440,3610) 3440,3510 v1@3595,3355 ; v1@3775,3795 3820,3795 3931.1,3683.9 U1.16 ; v1(4435,3120) 4555,3120 4635,3040 4800,3040 v1(4835,3075) ; R8.2 4854.53,2864.53 4870,2880 v1(4865,2885)
  Bottom Layer w8: v1(3440,3610) 3630,3800 v1(3780,3800) ; v1@3595,3355 3720,3230 4325,3230 v1(4435,3120) ; v1(4835,3075) 4865,3045 v1(4865,2885)
  other v1: 3595,3360
NetR36_2: R36.2 U8.1 | length 382.1
  Top Layer w8: R36.2 v1(4225,5623)
  Bottom Layer w8: U8.1 4120.55,5799.45 4225,5695 v1(4225,5623)
NetR40_1: R40.1 U11.1 | length 548.8
  Top Layer w8: v1(3230,5580) U11.1@3310,5600 ; R40.1 v1(3564,5429.47)
  Bottom Layer w8: v1(3230,5580) 3413.47,5580 v1(3564,5429.47)
NetR41_1: R41.1 U12.1 | length 361.8
  Top Layer w8: U12.1 2535,4935 2630,4935 2730,4835 R41.1 R41.1@2726.03,4778.5
NetR42_1: R42.1 U13.1 | length 493.4
  Top Layer w8: U13.1@2605,2945 2570,3005 2640,3075 2640,3230 2670,3260 2765,3260 2770,3255 R42.1
NetR43_1: R43.1 U14.1 | length 642.3
  Top Layer w8: v1(3285,2660) R43.1 3325,2660 ; U14.1@3425,2360 v1(3500,2330)
  Bottom Layer w8: v1(3285,2660) 3285,2540 3385,2440 3385,2340 3395,2330 v1(3500,2330)
NetR44_1: R44.1 U15.1 | length 447.2
  Top Layer w8: v1(4486,2578) 4486,2585.53 R44.1 ; v1(4680,2400) U15.1@4770,2430
  Bottom Layer w8: v1(4486,2578) 4664,2400 v1(4680,2400)
NetR45_1: R45.1 U16.1 | length 356.4
  Top Layer w8: R45.1 5270,3155 5370,3055 5460,3055 U16.1@5495,3115
NetR46_1: R46.1 U17.1 | length 671.2
  Top Layer w8: R46.1 v1(5301.47,4709) ; U17.1@5395,5055 5394.22,5056.56 5365,5115 v1(5400,5150)
  Bottom Layer w8: v1(5301.47,4709) 5410,4817.53 5410,5150 v1(5400,5150)
NetR47_1: R47.1 U18.1 | length 494.2
  Top Layer w8: v1(4435,5690) U18.1@4500,5670 ; R47.1 v1(4590,5395)
  Bottom Layer w8: v1(4435,5690) 4590,5535 4590,5435 ; v1(4590,5395) 4590,5435 ; 4590,5433.47 4590,5435
PLLFILT: C27.1 C28.1 U9.14 | length 88.5
  Top Layer w8: C28.1@2845,3305 2900,3305 2910,3305 ; 2910.8,3305.8 U9.14
RESET: J2.11 R6.1 SW2.3 U1.5 | length 2631
  Top Layer w8: U1.5 4207.53,3559.84 4207.69,3560 4464.75,3560 4466.75,3558 4533,3558 4560,3585 v1(4560,3650) ; v1@4195,4795 v1(4200,4795) ; R6.1 v1(4200,4795) ; v1(4260,4735) v1(4200,4795) ; SW2.3 4228,4795 v1(4200,4795)
  Bottom Layer w8: v1(4200,4795) J2.11 ; v1(4260,4735) 4260,4640 4380,4520 4380,4360 ; 4381.5,4361.5 4560,4183 v1@4560,3666.75 ; 4560,3615 v1(4560,3650)
SPI_BOTTOM_CLK: U1.12 U9.2 U10.14 | length 1940.8
  Top Layer w8: v1(2935,3085) 2935,3025 2950.94,3009.06 U10.14 ; v1@2935,3090 2935,3135 2960,3160 2970,3160 3000.2,3190.2 U9.2 ; v1@3573.5,3588.5 3670,3685 3670,3765 3775,3870 3990,3870 4009.84,3850.16 U1.12
  Bottom Layer w8: v1@2935,3101 2935,3135 2980,3180 3097.37,3180 3228.37,3311 3276,3311 3545,3580 v1(3565,3580)
SPI_BOTTOM_MISO: U1.11 U9.4 U10.12 | length 1795.4
  Top Layer w8: U10.12 3045.18,3120.18 3055,3130 ; U10.12@3046,3065 U10.12@3050,3069 ; U9.4 3051.39,3133.61 3055,3130 ; v1@3235.13,3220.13 3225.13,3220.13 3220,3215 3220,3180 3165,3125 3060,3125 3055,3130 ; U1.11 4029.53,3774.53 4045,3790 v1(4045,3840)
  Bottom Layer w8: v1(3220,3220) 3229.75,3220 3229.75,3229.75 3270,3270 3409,3270 ; 3410,3270 3409,3270 ; v1(4045,3840) 4045,3835 3975,3765 3775,3765 3645,3635 3645,3460 3455,3270 3409,3270
SPI_BOTTOM_MOSI: U1.10 U9.3 U10.13 | length 1891.2
  Top Layer w8: v1@2970,3125 v1(2975,3125) 3015,3125 ; U10.13 3013.68,3123.68 3015,3125 ; U9.3 3025.8,3135.8 3015,3125 ; v1(3610,3500) v1(3690,3500) ; U1.10 4049.21,3729.21 4080,3760 4080,3780 4095,3795 v1(4080,3795)
  Bottom Layer w8: v1(2975,3125) 3005,3155 3095,3155 3235,3295 3415,3295 3610,3490 v1(3610,3500) ; v1(3690,3500) 3690,3657.37 3781.63,3749 4044,3749 4075,3780 4080,3780 4095,3795 v1(4080,3795)
SPI_BOTTOM_SEL_ACCEL: U1.23 U10.7 | length 1013.5
  Top Layer w8: U10.7 3228.06,3009.06 3236,3017 3236,3181 3280,3225 3525,3225 ; 3528,3225 3525,3225 ; U1.23 3810.79,3500.79 3535,3225 3525,3225
SPI_BOTTOM_SEL_GYRO: U1.22 U9.5 | length 920
  Top Layer w8: U9.5 3092.13,3255 3542.37,3255 3807.84,3520.47 U1.22
SPI_CLK: J1.5 U1.9 | length 1975.9
  Top Layer w8: v1(3580,4775) 3580,4675 3770,4485 3770,4350 3870,4250 v1(4005,4250) ; U1.9 4068.9,3693.9 4115,3740 4115,3840 v1(4110,3840)
  Bottom Layer w8: J1.5@3330,5145 3400,5145 3580,4965 v1(3580,4775) ; v1(4005,4250) 4005,3945 v1(4110,3840) 4110,3845 v1@4105,3850
SPI_MISO: J1.2 U1.14 | length 1516.7
  Top Layer w8: J1.2 3330,4840 3385,4785 v6(3385,4620) ; v1(3935,3805) 3970.47,3769.53 U1.14
  Bottom Layer w8: v6@3385,4625 3435,4575 3520,4575 3665,4430 3665,4244.01 3719.97,4189.04 3719.97,4020.03 v1(3935,3805)
SPI_MOSI: J1.3 U1.13 | length 1688
  Top Layer w8: J1.3@3330,4940 3480,4790 v1(3480,4610) ; v1(3969.88,3838) 3969.88,3835.12 3990.16,3814.84 U1.13
  Bottom Layer w8: v1(3480,4610) 3690,4610 3969.88,4330.12 v1(3969.88,3838)
SPI_SEL_CPU: J1.4 U1.21 | length 2455.8
  Top Layer w8: v1(3695,4715) 3695,4710 v1(3780,4625) ; v1(3795,3715) 3780,3715 3720,3655 3720,3585 3764.84,3540.16 U1.21
  Bottom Layer w8: J1.4@3335,5045 3400,4980 3400,4815 3500,4715 v1(3695,4715) ; v1(3780,4625) 3780,4560 4145,4195 4145,3790 4070,3715 v1(3795,3715)
VDDA: C29.2 C30.2 C31.2 L3.1 U9.1 U9.15 U9.16 U10.1 U10.4 U10.6 | length 1523.1
  Top Layer w8: C31.2@2885,3255 2885,3230 2935,3180 ; C31.2@2885,3260 2905.2,3280.2 U9.15 ; C31.2@2890.39,3254.61 U9.16 ; U9.1 2974.61,3194.61 2960,3180 2935,3180 ; C30.2@3013.68,2891.32 U10.1 ; C30.2 2980,2890 2900,2970 2900,3145 2935,3180 ; C30.2@3015,2890 3015,2830 3030,2815 3170,2815 3195,2840 3195,2880 3170,2905 3170,2950 3235,2950 3255,2970 3255,3102.37 3256.31,3103.69 C29.2 3290,3104.69 L3.1@3290,3155 ; 3108.17,2816.83 U10.4
pads on no net: J2.6 J2.10 J2.12 J2.13 J2.14 M1.A M1.C M1.E1 M1.E2 M1.K M1.NC M2.A M2.C M2.E1 M2.E2 M2.K M2.NC SW1.1 SW1.4 SW2.1 SW2.4 U1.4 U1.17 U1.20 U1.31 U1.33 U9.6 U9.7 U10.3 U10.8 U10.9 U10.10 U10.11 U11.4 U12.4 U13.4 U14.4 U15.4 U16.4 U17.4 U18.4
copper on no net: | length 14567.9
  Top Layer w10: 2149,3331 ccw(c4000,4000) 5851,3331 5323,3331 cw(c5323,3394) 5260,3394 5260,4606 cw(c5323,4606) 5323,4669 5851,4669 ccw(c4000,4000) 2149,4669 2677,4669 cw(c2677,4606) 2740,4606 2740,3394 cw(c2677,3394) 2677,3331 2149,3331
  other v2: 3952.76,3502.76 4000,3502.76 4047.24,3502.76 3952.76,3550 4000,3550 4047.24,3550 3952.76,3597.24 4000,3597.24 4047.24,3597.24
  other v3: 3255,3492 4745,3492 2907,3646 5093,3646 2907,4354 5093,4354 3255,4508 4745,4508
  other v4: 2907,3646 5093,3646 2907,4354 5093,4354
  other v5: 3550,2740 4450,2740
  other v7: 4000,2740

## Keep-outs
Mechanical 1:
  circle w5: c3255,3492 r125
  circle w5: c4745,3492 r125
  circle w5: c4745,4508 r125
  circle w5: c3255,4508 r125

## Silkscreen, mask and mechanical layers (free items; w line width, h text height)
Top Overlay:
  circle w10: c3564,3753 r50
  circle w10: c4361,3761 r50
  text "+" at 4342,3732 h60
  text "+" at 3543,3724 h60
  text "Motor" at 3574,3071 h80
  text "Driver" at 3590,2939 h80
Mechanical 1:
  circle w1: c4000,4000 r1550
  lines w5: 1610,4000 7540,4000 ; 4000,1955 4000,6085

## Text inside footprints (layer, text, board x,y; h text height)
J2: Top Overlay "2" at 3580,5165 h50; Top Overlay "1" at 3580,5065 h50; Top Overlay "14" at 4380,5165 h50; Top Overlay "13" at 4380,5065 h50